# EAGLE board AP_KACA_ver1 (EAGLE 8.4.1)
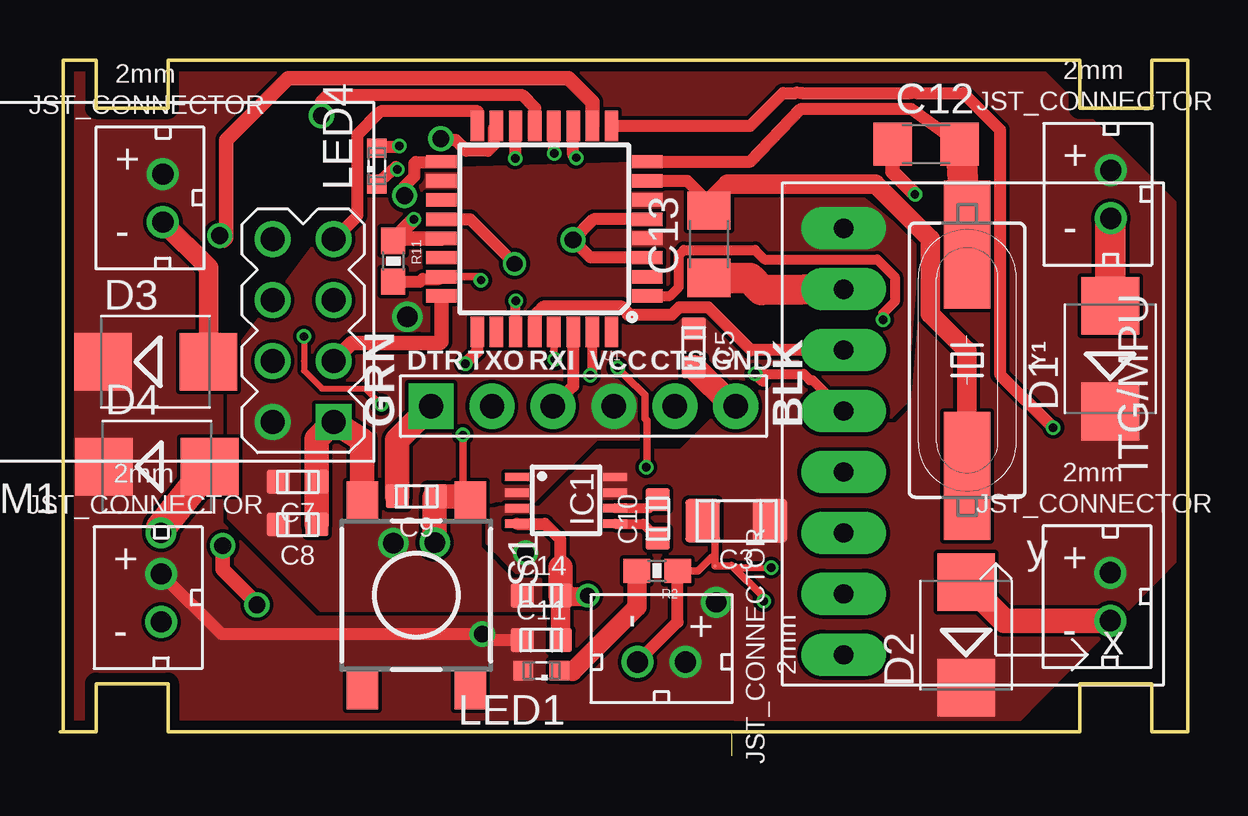
[diagram p0: board, top side]
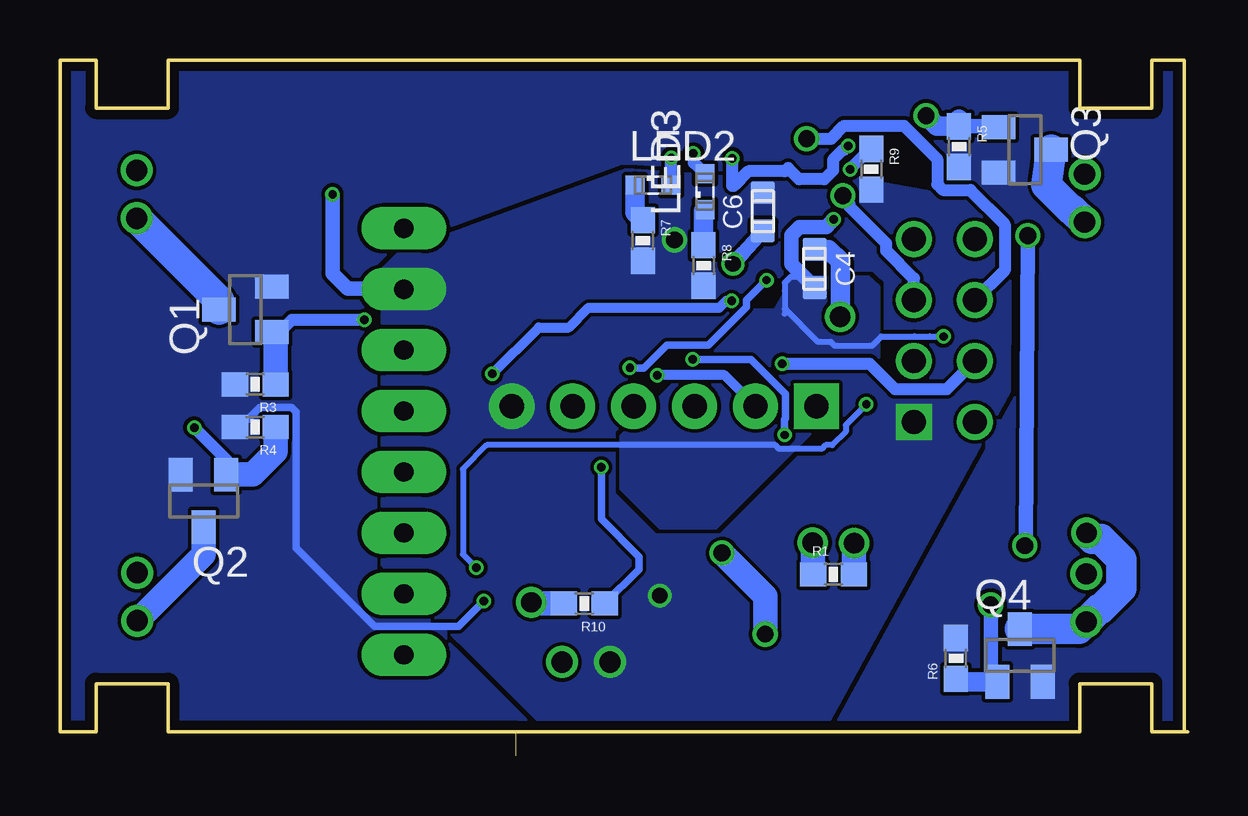
[diagram p1: board, bottom side, seen from below]

Size 47 x 29 mm. Coordinates in mm from the lower left corner, seen from the top.
Outline: 0.13,1 0,1 1.5,1
Outline: 0.13,1 1.5,1
Outline: 28,0 28,1
Outline: 0.13,1 0.13,29 1.5,29 1.5,27 4.5,27 4.5,29 42.5,29 42.5,27 45.5,27 45.5,29 47,29 47,1 45.5,1 45.5,3 42.5,3 42.5,1 28,1
Outline: 28,1 4.5,1 4.5,3 1.5,3 1.5,1
Copper layers (1*16): Top 0.035559375mm / dielectric 1.6mm / Bottom 0.035559375mm
Design rules "oshpark-2layer (2)": minimum track width 6mil, minimum drill 10mil, track to track 6mil, track to pad 6mil, pad to pad 6mil, via to via 6mil, smd to smd 6mil, copper to edge 15mil, drill to drill 6mil, minimum pad ring 5mil, minimum via ring 5mil, stop-mask expansion 2.5mil, vias tented up to drill 0mil, thermal gap 10mil

## Footprints (pad centres in the part's own frame; a part is rotated, then mirrored left to right if it is on the bottom)
C1206 = smd 1.8 x 1.45: 1 0,1.4; 2 0,-1.4
C0603 = smd 1 x 0.95: 1 0,0.8; 2 0,-0.8
RCL_C1206 = smd 1.6 x 1.8: 1 -1.4,0; 2 1.4,0
SMB = smd 2.4 x 2.4: A 2.2,0; C -2.2,0
MSOP8 = smd 0.35 x 1: 1 -0.975,-2.05; 2 -0.325,-2.05; 3 0.325,-2.05; 4 0.975,-2.05; 5 0.975,2.05; 6 0.325,2.05; 7 -0.325,2.05; 8 -0.975,2.05
FTDI_DEVICE_SIDE = drill 1.016 pad 1.88 square: P$1 -6.35,0 | drill 1.016 pad 1.88: P$2 -3.81,0; P$3 -1.27,0; P$4 1.27,0; P$5 3.81,0; P$6 6.35,0
JST_CONNECTOR_FEMALE = drill 0.889: + 0,1; - 0,-1
LED_SML0603 = smd 0.8 x 0.8: A 0.75,0; C -0.75,0
WIRELESS-NRF24L01 = drill 1 square: 1 -12.7,6.35 | drill 1: 2 -10.16,6.35; 3 -12.7,3.81; 4 -10.16,3.81; 5 -12.7,1.27; 6 -10.16,1.27; 7 -12.7,-1.27; 8 -10.16,-1.27
SOT23 = smd 1 x 1.4: 1 -0.95,-1.1; 2 0.95,-1.1; 3 0,1.1
0603 = smd 1.1 x 1: 1 -0.85,0; 2 0.85,0
DTSM-6 = smd 1.55 x 1.3: 1 -3.975,2.25; 2 3.975,2.25; 3 -3.975,-2.25; 4 3.975,-2.25
TQFP32-08 = smd 1.27 x 0.559: 1 -4.293,2.8; 2 -4.293,2; 3 -4.293,1.2; 4 -4.293,0.4; 5 -4.293,-0.4; 6 -4.293,-1.2; 7 -4.293,-2; 8 -4.293,-2.8; 17 4.293,-2.8; 18 4.293,-2; 19 4.293,-1.2; 20 4.293,-0.4; 21 4.293,0.4; 22 4.293,1.2; 23 4.293,2; 24 4.293,2.8 | smd 0.559 x 1.27: 9 -2.8,-4.293; 10 -2,-4.293; 11 -1.2,-4.293; 12 -0.4,-4.293; 13 0.4,-4.293; 14 1.2,-4.293; 15 2,-4.293; 16 2.8,-4.293; 25 2.8,4.293; 26 2,4.293; 27 1.2,4.293; 28 0.4,4.293; 29 -0.4,4.293; 30 -1.2,4.293; 31 -2,4.293; 32 -2.8,4.293
GY-521 = drill 0.8 pad 1.778 long: ADO -8.89,-6.35; GND -8.89,6.35; INT -8.89,-8.89; SCL -8.89,3.81; SDA -8.89,1.27; VCC -8.89,8.89; XCL -8.89,-3.81; XDA -8.89,-1.27
SPLITTER = smd 0.102 x 0.102: 1 0,0; 2 0,0
HC49UP = smd 5.334 x 1.93: 1 -4.826,0; 2 4.826,0

## Placement (x,y rotation side)
C3  100uF  [C1206]  28.19,9.79 90 top
C4  100nF  [C0603]  15.55,20.3 180 bottom
C5  100nF  [C0603]  26.42,17 180 top
C6  100nF  [C0603]  17.7,22.67 0 bottom
C7  10uF  [C0603]  9.91,11.41 90 top
C8  100nF  [C0603]  9.91,9.64 90 top
C9  100nF  [C0603]  14.86,10.8 90 top
C10  1uF  [C0603]  24.92,9.86 0 top
C11  10uF  [C0603]  20.07,4.81 270 top
C12  60pF  [RCL_C1206]  36.1,25.49 0 top
C13  60pF  [RCL_C1206]  27.05,21.32 90 top
C14  10uF  [C0603]  20.07,6.66 270 top
D1  ES2D  [SMB]  43.78,16.54 90 top
D2  ES2D  [SMB]  37.77,5.03 90 top
D3  ES2D  [SMB]  3.99,16.42 0 top
D4  ES2D  [SMB]  4.04,12.05 0 top
IC1  MCP1252-33X50  [MSOP8]  21.09,10.64 270 top
J1  FTDI_DEVICE  [FTDI_DEVICE_SIDE]  21.82,14.56 0 top
JST_MOTOR_1  JST_MOTOR_1  [JST_CONNECTOR_FEMALE]  43.8,23.4 0 top
LED1  [LED_SML0603]  20.07,3.54 180 top
LED2  [LED_SML0603]  22.28,23.78 0 bottom
LED3  [LED_SML0603]  20.12,23.5 90 bottom
LED4  [LED_SML0603]  13.21,24.57 90 top
M1  WIRELESS-NRF24L01  [WIRELESS-NRF24L01]  -1.3,20.25 180 top
Q1  BSS123  [SOT23]  39.27,18.6 90 bottom
Q2  BSS123  [SOT23]  41.01,10.62 180 bottom
Q3  BSS123  [SOT23]  6.78,25.26 270 bottom
Q4  BSS123  [SOT23]  6.99,4.17 0 bottom
R1  10k  [0603]  14.76,7.55 0 bottom
R2  510  [0603]  24.89,7.71 180 top
R3  10k  [0603]  38.86,15.48 180 bottom
R4  10k  [0603]  38.86,13.7 180 bottom
R5  10k  [0603]  9.53,25.38 270 bottom
R6  10k  [0603]  9.65,4.05 90 bottom
R7  510  [0603]  22.71,21.47 270 bottom
R8  510  [0603]  20.17,20.43 270 bottom
R9  510  [0603]  13.18,24.44 270 bottom
R10  10k  [0603]  25.15,6.33 180 bottom
R11  10k  [0603]  13.89,20.61 270 top
S1  DTSM-6  [DTSM-6]  14.85,6.69 270 top
U1  ATMEGA328P_TQFP  [TQFP32-08]  20.19,21.96 180 top
U3  GY-521MPU6050  [GY-521]  41.55,13.09 0 top
U$2  JST_CONNECTOR_FEMALE  [JST_CONNECTOR_FEMALE]  25.07,3.9 270 top
U$3  JST_CONNECTOR_FEMALE  [JST_CONNECTOR_FEMALE]  43.78,6.62 0 top
U$4  JST_CONNECTOR_FEMALE  [JST_CONNECTOR_FEMALE]  4.22,6.58 0 top
U$5  JST_CONNECTOR_FEMALE  [JST_CONNECTOR_FEMALE]  4.29,23.24 0 top
U$6  SPLITTER  [SPLITTER]  28.57,7.83 0 top
U$7  SPLITTER  [SPLITTER]  27.99,7.93 0 top
U$8  SPLITTER  [SPLITTER]  27.3,7.91 0 top
Y1  8MHz  [HC49UP]  37.81,16.49 270 top

## Library data of the parts
C3-C11 C14 = we-rcl
C12 C13 = OPS_Project_6_LIB
D1-D4 = diode
IC1 = microchip-MCP125x-xxx
J1 M1 U3 = quad
JST_MOTOR_1 U$2-U$5 = JST_CONNECTOR_FEMALE. through hole
LED1-LED4 = eagle-ltspice; SPICEMODEL: NONE; SPICEPREFIX: D; SPICETYPE: diode
Q1-Q4 = transistor-small-signal
R1-R11 = SparkFun-Resistors; PROD_ID: RES-09570
S1 = switch-tact
U1 = quad; PROD_ID: IC-09069
U$6-U$8 = splitter
Y1 = SparkFun-Clocks; PROD_ID: XTAL-11706

## Nets
3.3V: C4.2 C5.2 C7.1 C8.1 C14.2 IC1.2 J1.P$4 M1.2 R1.2 U1.4 U1.6 U1.18 U3.VCC
3.7V: C3.2 C11.2 D1.C D2.C D3.C D4.C IC1.3 IC1.7 IC1.8 JST_MOTOR_1.+ LED1.A R10.2 U$2.+ U$3.+ U$4.+ U$5.+
AGND: C4.1 R11.1 U1.21 U$6.2
CE: M1.3 U1.24
CSN: M1.4 U1.25
DGND: C3.1 C5.1 C6.1 C7.2 C8.2 C11.1 C12.1 C13.1 C14.1 IC1.4 J1.P$6 M1.1 R2.1 R7.2 R8.2 R9.2 S1.3 U1.3 U1.5 U3.GND U$2.- U$8.2
DTR: C9.1 J1.P$1
GND: U$6.1 U$7.1 U$8.1
LED_1: LED2.A U1.11
LED_2: LED3.A U1.12
LED_3: LED4.A U1.14
MGND: Q1.2 Q2.2 Q3.2 Q4.2 R3.2 R4.2 R5.2 R6.2 U$7.2
MISO: M1.7 U1.16
MOSI: M1.6 U1.15
MOTOR_1: Q1.1 R3.1 U1.1
MOTOR_2: Q2.1 R4.1 U1.9
MOTOR_3: Q4.1 R6.1 U1.10
MOTOR_4: Q3.1 R5.1 U1.13
N$1: D2.A Q2.3 U$3.-
N$2: D1.A JST_MOTOR_1.- Q1.3
N$3: D3.A Q3.3 U$5.-
N$4: D4.A Q4.3 U$4.-
N$5: LED1.C R2.2
N$6: C13.2 U1.7 Y1.2
N$7: C12.2 U1.8 Y1.1
N$9: C6.2 U1.20
N$11: C10.2 IC1.5
N$12: C10.1 IC1.6
N$15: LED3.C R8.1
N$16: LED2.C R7.1
N$17: LED4.C R9.1
RESET: C9.2 R1.1 S1.1 U1.29
RX: J1.P$3 U1.30
SCK: M1.5 U1.17
SCL: U1.28 U3.SCL
SDA: U1.27 U3.SDA
TX: J1.P$2 U1.31
V_READER: R10.1 R11.2 U1.23

## Tracks (layer width: path | path; a pad name or v marks a point on that pad's centre or on a via)
3.3V  (via drill 0.85)
  Bottom 0.813: C4.2 14.97,21.1 14.48,20.61 v14.48,18.3
  Bottom 1.016: R1.2 13.91,8.66 13.89,8.67 v13.89,8.85
  pour Top (no thermals): 7.04,9.89 10.87,6.05 20.07,6.05 20.04,6.08 20.04,7.35 18.82,7.35 17.5,8.67 17.5,10.07 17.91,10.47 17.91,10.55 17.93,10.55 18.19,10.63 19.81,10.63 22.38,13.19 33.73,13.19 35.23,14.69 35.79,21.35 31.47,24.9 12.9,24.39 7.04,16.52
3.7V  (via drill 0.7, 0.85)
  Top 0.508: 19.05,5.03 C11.2 17.86,4.81 v17.6,5.06 6.73,5.06 U$4.+
  Bottom 1.016: R10.2 27.3,6.33 v27.36,6.38 | v17.6,5.06 17.6,6.64 v19.41,8.44
  pour Top (rank 5, no thermals): 14.17,5.98 14.15,1.25 14.12,1.23 7.09,1.23 0.41,1.25 0.58,28.74 6.6,28.69 40.84,28.69 46.71,22.82 46.71,8.32 39.85,1.33 14.78,1.2 14.3,1.46 14.3,6 14.91,6.03 17.48,5.93 20.04,6.05 17.35,9.03 17.32,10.55 19.84,10.58 19.96,12.71 25.86,12.71 28.37,15.22 28.37,15.25 34.09,20.96 34.09,20.99 34.72,21.62 34.67,21.62 32.33,23.96 32.28,23.96 31.55,24.7 16.74,24.7 7.37,15.33 7.37,9.43 11.02,5.93
AGND  (via drill 0.35)
  Top 0.254: v10.17,17.47 10.17,16.45 | 10.17,16.45 10.19,16.44 | 10.17,16.45 10.17,16.05 10.92,15.3 12.72,15.3 v13.39,14.64 | U$6.2 v29.64,7.83
  Top 0.61: U1.21 14,21.56 R11.1 13.89,21.5 v14.76,22.36
  Bottom 0.254: 16.79,19.37 16.79,19.71 16.55,19.95 16.21,19.95 15.77,19.5 C4.1 | 16.79,19.37 | 16.79,19.37 16.79,18.63 | 16.79,18.63 16.79,18.42 | 16.79,18.63 15.42,17.26 14.88,17.26 14.72,17.09 13.14,17.09 12.76,17.47 11.4,17.47 | 11.4,17.47 11.38,17.48 | 11.4,17.47 10.74,17.47 | 10.74,17.47 10.73,17.46 | 10.74,17.47 v10.18,17.47 v10.17,17.47 | v13.39,14.64 14.25,13.78 14.25,13.51 14.82,12.94 15.09,12.94 15.24,12.79 17.03,12.79 17.19,12.94 29.21,12.94 30.2,11.95 30.2,8.39 v29.64,7.83
  Bottom 0.61: v14.76,22.36 15.06,22.03 16.18,22.03 16.5,21.71 16.5,20.49 15.55,19.53 C4.1
  pour Bottom (no thermals): 17.2,18.58 18.36,18.58 23.62,13.32 23.62,11.11 22,9.48 19.66,9.48 12.88,16.27 12.88,19.57 13.31,19.95 16.38,19.95 16.84,19.16 17.2,18.55
CE
  Top 0.61: M1.3 12.16,17.2 14.93,17.2 15.85,17.2 15.9,17.25 U1.24
CSN  (via drill 0.35)
  Top 0.508: U1.25 17.39,16.84 v16.89,16.34
  Bottom 0.508: v16.89,16.34 13.26,16.34 12.19,15.28 10.03,15.28 M1.4
DGND  (via drill 0.35, 0.65, 0.7)
  Top 0.305: U$8.2 27.3,8.26 | 27.3,8.26 27.3,9.28 C3.1 | 27.3,8.26 27.16,8.26 26.6,7.71 R2.1
  Top 0.508: U$2.- 25.74,5.57 R2.1 | IC1.4 20.21,9.67 20.85,9.03 20.85,7.86 20.87,7.84 | U1.5 22.25,22.36 v21.39,21.5 22.12,20.76 U1.3
  Top 0.61: C12.1 34.7,24.34 v35.64,23.4
  Top 0.813: C11.1 C14.1 21.89,6.61 v22,6.66
  Top 1.016: S1.3 12.6,13.16 M1.1 10.71,13.21 C7.2 C8.2 | C5.1 28.05,14.56 J1.P$6 | 20.87,7.84 C14.1
  Top 1.27: U3.GND 29.23,19.41 28.75,19.9 27.07,19.9 C13.1
  Bottom 0.61: v35.64,23.4 35.64,20.1 35,19.47 32.69,19.47 U3.GND
  pour Bottom (rank 3, no thermals): 13.72,24.04 7.39,22.89 7.42,15.2 14.94,1.48 27.1,1.48 33.55,7.93 33.55,20.28 32.89,20.94 23.39,24.42 18.29,24.06 13.69,24.06
DTR
  Top 1.016: C9.1 14.06,13.15 J1.P$1
GND
  Top 0.305: U$6.1 28.09,7.83 U$7.1 27.96,7.91 U$8.1
LED_1  (via drill 0.35)
  Top 0.508: v21.51,24.93 21.39,25.05 U1.11
  Bottom 0.508: LED2.A 21.53,24.91 v21.51,24.93
LED_2  (via drill 0.35)
  Top 0.508: v20.6,25.11 U1.12
  Bottom 0.508: LED3.A 20.57,24.71 20.57,24.95 v20.6,25.11
LED_3  (via drill 0.35)
  Top 0.508: LED4.A 13.28,25.39 14.14,25.39 14.15,25.4 v14.15,25.42 | v18.97,24.9 18.99,24.92 U1.14
  Bottom 0.508: v14.15,25.42 14.31,25.25 14.36,25.25 14.77,24.84 14.77,24.39 15.14,24.03 16.19,24.03 16.66,24.5 16.8,24.36 18.32,24.36 18.91,23.76 18.97,23.76 v18.97,24.9
MGND  (via drill 0.35)
  Top 0.305: U$7.2 29.34,6.59 v29.34,6.44
  Bottom 0.305: v29.34,6.44 30.38,5.39 33.9,5.39 37.16,8.66 37.16,14.33 37.34,14.51 38.68,14.51 39.49,13.7 R4.2
  pour Bottom (rank 5, no thermals): 0.56,27.19 0.56,1.28 0.61,1.23 46.61,1.23 46.76,1.38 46.76,28.76 46.71,28.81 0.94,28.81 0.74,28.61 0.61,28.38
MISO
  Top 0.508: M1.7 12.4,22.52 12.4,25.89 13.37,26.86 17.42,26.86 17.42,26.42 17.41,26.41 17.41,26.28 U1.16
MOSI  (via drill 0.7)
  Top 0.508: U1.15 18.07,26.14 18.07,25.45 17.84,25.21 16.94,25.21 16.49,25.66 15.9,25.66 15.88,25.69 v15.88,25.72
  Bottom 0.508: v15.88,25.72 14.85,25.72 14.32,26.25 11.81,26.25 10.43,24.87 10.43,23.82 10.19,23.58 9.04,23.58 7.62,22.16 7.62,20.23 M1.6
MOTOR_1  (via drill 0.35)
  Top 0.406: U1.1 25.42,19.16 25.79,19.54 25.79,20.87 26,21.08 28.98,21.08 29.37,20.68 34.07,20.68 34.8,19.96 34.8,18.93 34.31,18.44 v34.31,18.17
  Bottom 0.508: 38.01,17.49 37.33,18.17 v34.31,18.17
  Bottom 1.016: Q1.1 38.01,17.49 R3.1
MOTOR_2  (via drill 0.35)
  Top 0.508: v41.4,13.68 39.18,15.89 39.18,26.09 37.65,27.62 35.69,27.62 35.64,27.65 35.42,27.62 30.93,27.62 30.71,27.65 30.67,27.62 30.14,27.62 28.77,26.25 U1.9
  Bottom 0.508: v41.4,13.68 40.06,12.34 Q2.1
  Bottom 1.016: Q2.1 38.97,11.71 38.01,12.67 R4.1
MOTOR_3  (via drill 0.7)
  Top 0.61: U1.10 22.19,27.25 21.2,28.24 9.51,28.24 6.93,25.66 6.93,21.57 6.83,21.47 v6.66,21.68 | v6.78,8.75 6.78,7.76 8.2,6.33 v8.2,6.28
  Bottom 0.61: v6.66,21.68 6.73,8.85 6.78,8.82 v6.78,8.75 | v8.2,6.28 8.2,3.34 Q4.1
  Bottom 0.813: Q4.1 9.53,3.08 R6.1
MOTOR_4  (via drill 0.7)
  Top 0.508: U1.13 19.81,26.28 19.81,27.01 19.3,27.53 11.14,27.53 10.87,27.26 10.87,26.73 10.82,26.68 v10.9,26.68
  Bottom 0.61: Q3.1 8.11,26.23 R5.1
  Bottom 0.813: 9.53,26.53 R5.1 10.45,26.23 v10.9,26.68
N$1
  Top 1.016: D2.A 39.37,5.62 U$3.-
  Bottom 1.016: U$3.- 41.01,8.39 Q2.3
N$2
  Top 1.27: D1.A 43.78,22.38 JST_MOTOR_1.-
  Bottom 1.27: Q1.3 40.37,18.97 JST_MOTOR_1.-
N$3
  Top 0.813: U$5.- 6.19,20.34 D3.A
  Bottom 1.27: U$5.- 4.84,22.79 4.89,22.79 5.88,23.78 Q3.3
N$4  (via drill 0.85)
  Top 1.27: D4.A 4.22,9.52 v4.22,9.28
  Bottom 1.27: Q4.3 4.52,5.28 U$4.- 3.67,6.12 3.62,6.12 2.77,6.97 2.77,8.18 3.62,9.03 3.97,9.03 v4.22,9.28
N$5
  Top 0.813: LED1.C 21.34,3.54 21.36,3.52 24.04,6.2 R2.2
N$6
  Top 0.508: U1.7 26.14,23.96 27.05,23.05 C13.2
  Top 0.813: Y1.2 37.81,16.89 36.29,18.41 36.29,21.53 34,23.82 27.82,23.82 27.05,23.05
N$7
  Top 0.508: U1.8 28.79,24.76 30.89,26.96 35.48,26.96 C12.2
  Top 1.27: C12.2 37.58,25.03 Y1.1
N$9  (via drill 0.65)
  Top 0.508: U1.20 17.09,22.36 v18.95,20.51
  Bottom 0.61: v18.95,20.51 18.54,20.94 C6.2
N$11
  Top 0.406: IC1.5 24.32,9.67 C10.2
N$12
  Top 0.406: IC1.6 24.57,10.32 C10.1
N$15
  Bottom 0.813: LED3.C 20.17,22.7 R8.1
N$16
  Bottom 0.813: LED2.C 23.03,22.64 R7.1
N$17  (via drill 0.35)
  Top 0.508: LED4.C 14.01,24.55 v14.07,24.44
  Bottom 0.508: v14.07,24.44 13.22,25.29 R9.1
RESET  (via drill 0.35, 0.85)
  Top 0.305: U1.29 20.59,16.55 v20.62,16.52 | v16.79,13.37 16.79,10.97 S1.1
  Top 1.016: S1.1 16.96,10.8 C9.2 15.62,10.77 v15.62,8.87
  Bottom 0.305: v16.79,13.37 16.79,14.02 16.76,14.05 16.76,15.08 18.2,16.52 v20.62,16.52
  Bottom 1.016: R1.1 15.61,8.86 v15.62,8.87
RX
  Top 0.508: U1.30 21.39,15.4 J1.P$3
SCK  (via drill 0.7)
  Top 0.508: v14.36,23.34 14.36,23.73 14.77,24.15 14.78,24.16 14.78,24.69 14.83,24.75 15.88,24.75 U1.17
  Bottom 0.508: M1.5 11.4,19.89 12.56,21.04 12.56,21.35 14.09,22.88 14.09,22.99 14.35,23.25 v14.35,23.34 v14.36,23.34
SCL
  Top 0.508: U3.SCL 28.81,16.9 27.03,18.68 25.8,18.68 25.49,18.37 24.38,18.37 23.68,18.37 23.68,18.47 23.44,18.71 20.14,18.71 19.9,18.47 19.9,18.46 19.76,18.32 19.79,18.3 U1.28
SDA  (via drill 0.35)
  Top 0.406: U1.27 18.99,18.95 v19,18.96 | 29.31,15.58 v28.98,15.91 31.01,15.91 31.26,15.66 31.37,15.66 U3.SDA
  Bottom 0.406: v19,18.96 19.24,18.96 19.52,18.68 24.97,18.68 25.79,17.85 27.04,17.85 v28.98,15.91
TX  (via drill 0.35)
  Top 0.406: v22.1,15.86 22.19,15.95 U1.31
  Bottom 0.406: J1.P$2 19.3,15.86 v22.1,15.86
V_READER  (via drill 0.35)
  Top 0.305: U1.23 17.41,19.96 v17.55,19.82 | v23.24,16.16 23.6,15.81 24.38,15.03 24.38,14.05 24.46,13.97 24.46,12.05 v24.43,12.02
  Top 0.508: R11.2 15.01,19.76 15.12,19.87 15.81,19.87 U1.23
  Bottom 0.305: v17.55,19.82 18.39,18.98 18.39,18.71 19.98,17.12 21.69,17.12 22.65,16.16 v23.24,16.16 | v24.43,12.02 24.43,9.87 22.86,8.29 22.86,7.77 R10.1